# Altium PCB touch_cap.PcbDoc
Units mil, origin at the board's own origin, x right, y up, seen from the top; angles counter-clockwise.
Board outline 905.51 x 836.61 mil, 2 copper layers (Top Layer, Bottom Layer); 5 components, 6 nets, 15 pads, 0 vias.
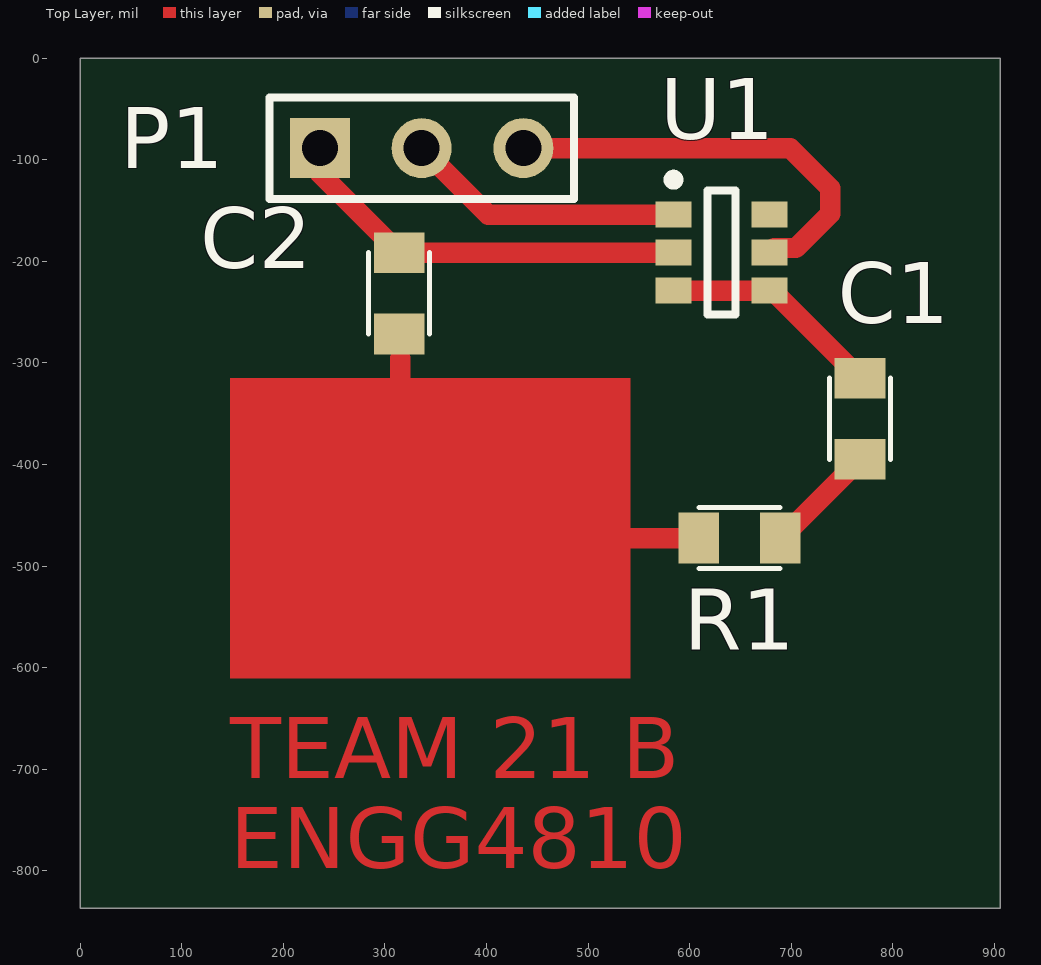
[diagram p0: Top Layer view]
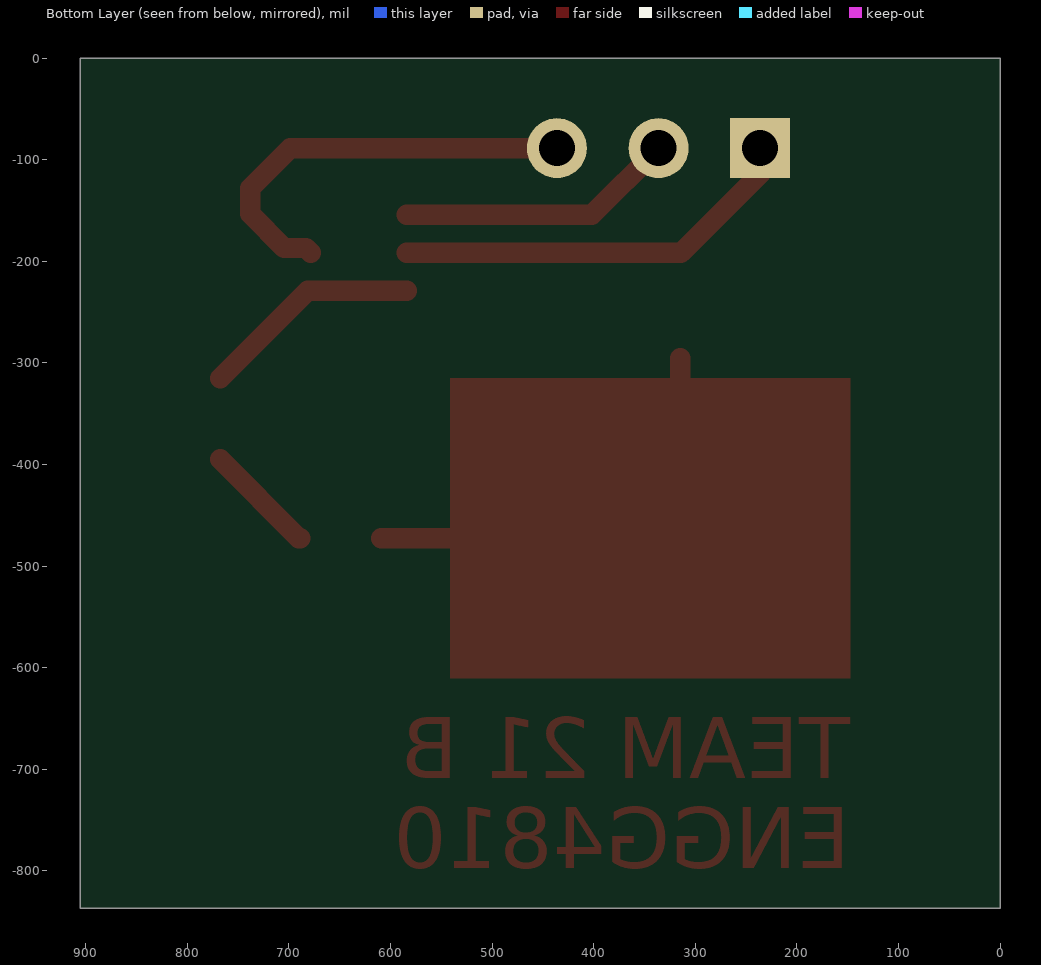
[diagram p1: Bottom Layer view, seen from below]

## Layer stack, top to bottom
Top Layer: signal copper 1.4
Dielectric: dielectric 12.6, FR-4, Dk 4.8
Bottom Layer: signal copper 1.4

## Board outline
0,-836.61 0,0 905.51,0 905.51,-836.61

## Design rules (kind name [scope] priority, off if disabled: settings)
Clearance [All] p1: gap=10
PolygonConnect [All] p1: connectstyle=Relief reliefconductorwidth=10 reliefentries=4 polygonreliefangle="90 Angle" airgapwidth=10
RoutingVias [All] p1: holewidth=28 width=50 viastyle="Through Hole" minholewidth=28 minwidth=50 maxholewidth=28 maxwidth=50
SolderMaskExpansion [All] p1: expansion=4
Width [All] p1: maxlimit=25 minlimit=10 preferedwidth=20
28 further rules are at their usual default settings.

## Components (designator, comment, footprint, x,y, rotation, side; value= is the part's Value field where it differs from the comment)
C1 "Cap" 0805E 767.72,-314.96 r270 top
C2 "Cap" 0805E 314.02,-191.54 r270 top
P1 "Header 3" HDR1X3 236.22,-88.58 r0 top
R1 "Res1" 0805E 688.98,-472.44 r180 top
U1 "TOUCH SENSOR IC" SOT23-6_L 631.26,-191.54 r0 top

## Footprints (in the part's own frame and the unit in brackets; to place one, negate y for a bottom-side part, rotate by r counter-clockwise, add the part's x,y. Pads: shape width x height; smd on the part's side, far side on the other; paste and mask are expansions set on the pad)
0805E [mil]
  rect 40x50 smd: 1(0,0) 2(80,0)
  silkscreen extent 0,-30 80,30
HDR1X3 [mm] "Connector; Header; 3 Position"
  rect 1.5x1.5 hole 0.9: 1(0,0)
  round 1.5 hole 0.9: 2(2.54,0) 3(5.08,0)
  silkscreen extent -1.27,-1.27 6.35,1.27
SOT23-6_L [mm] "SOT23, 6-Leads, Body 2.9x1.6mm, Pitch 0.95mm, Lead Span 2.7mm, IPC High Density"
  rect 0.9x0.65 smd: 1(-1.2,0.95) 2(-1.2,0) 3(-1.2,-0.95) 4(1.2,-0.95) 5(1.2,0) 6(1.2,0.95)
  silkscreen extent -1.32,-1.55 0.35,1.95, body extent -0.9,-1.55 0.9,1.55, height 1.45

## Part data
C1 C2: "Capacitor"
P1: "Header, 3-Pin"
R1: "Resistor"
U1: library part AT42QT1011

## Nets (pads, with @x,y where several pads share a name; then routed paths per layer and width w, separated by ;. In a path a pad name is that pad's centre, name@x,y a point inside that pad or via, vN(x,y) a via of type N, cw(c..) or ccw(c..) an arc to the next point about the centre after c; other vN are vias at no path point)
GND: C2.1 P1.1 U1.2 | length 405.2
  Top Layer w20: P1.1 236.22,-113.74 C2.1 U1.2
NetC1_1: C1.1 U1.3 U1.4 | length 219.3
  Top Layer w20: U1.3 U1.4 681.69,-228.94 C1.1
NetC1_2: C1.2 R1.1 | length 110.8
  Top Layer w20: R1.1 690.24,-472.44 C1.2
NetC2_2: C2.2 R1.2 | length 175.9
  Top Layer w20: 314.96,-374.02 314.96,-295.28 ; 511.81,-472.44 R1.2
OUT: P1.2 U1.1 | length 274.9
  Top Layer w20: P1.2 401.77,-154.13 U1.1
VCC: P1.3 U1.5 | length 419.1
  Top Layer w20: P1.3 698.82,-88.58 738.19,-127.95 738.19,-153.24 704.5,-186.93 683.11,-186.93 U1.5
pads on no net: U1.6

## Other copper
Top Layer:
  region net NetC2_2: 147.64,-314.96 541.34,-314.96 541.34,-610.24 147.64,-610.24
  text "TEAM 21 B" at 147.64,-708.66 h60
  text "ENGG4810" at 147.64,-797.24 h60

## Silkscreen, mask and mechanical layers (free items; w line width, h text height)
Mechanical 1:
  the board outline again, w20